# EAGLE board EasyBMS_Panel (EAGLE 9.6.2), part 1 of 2
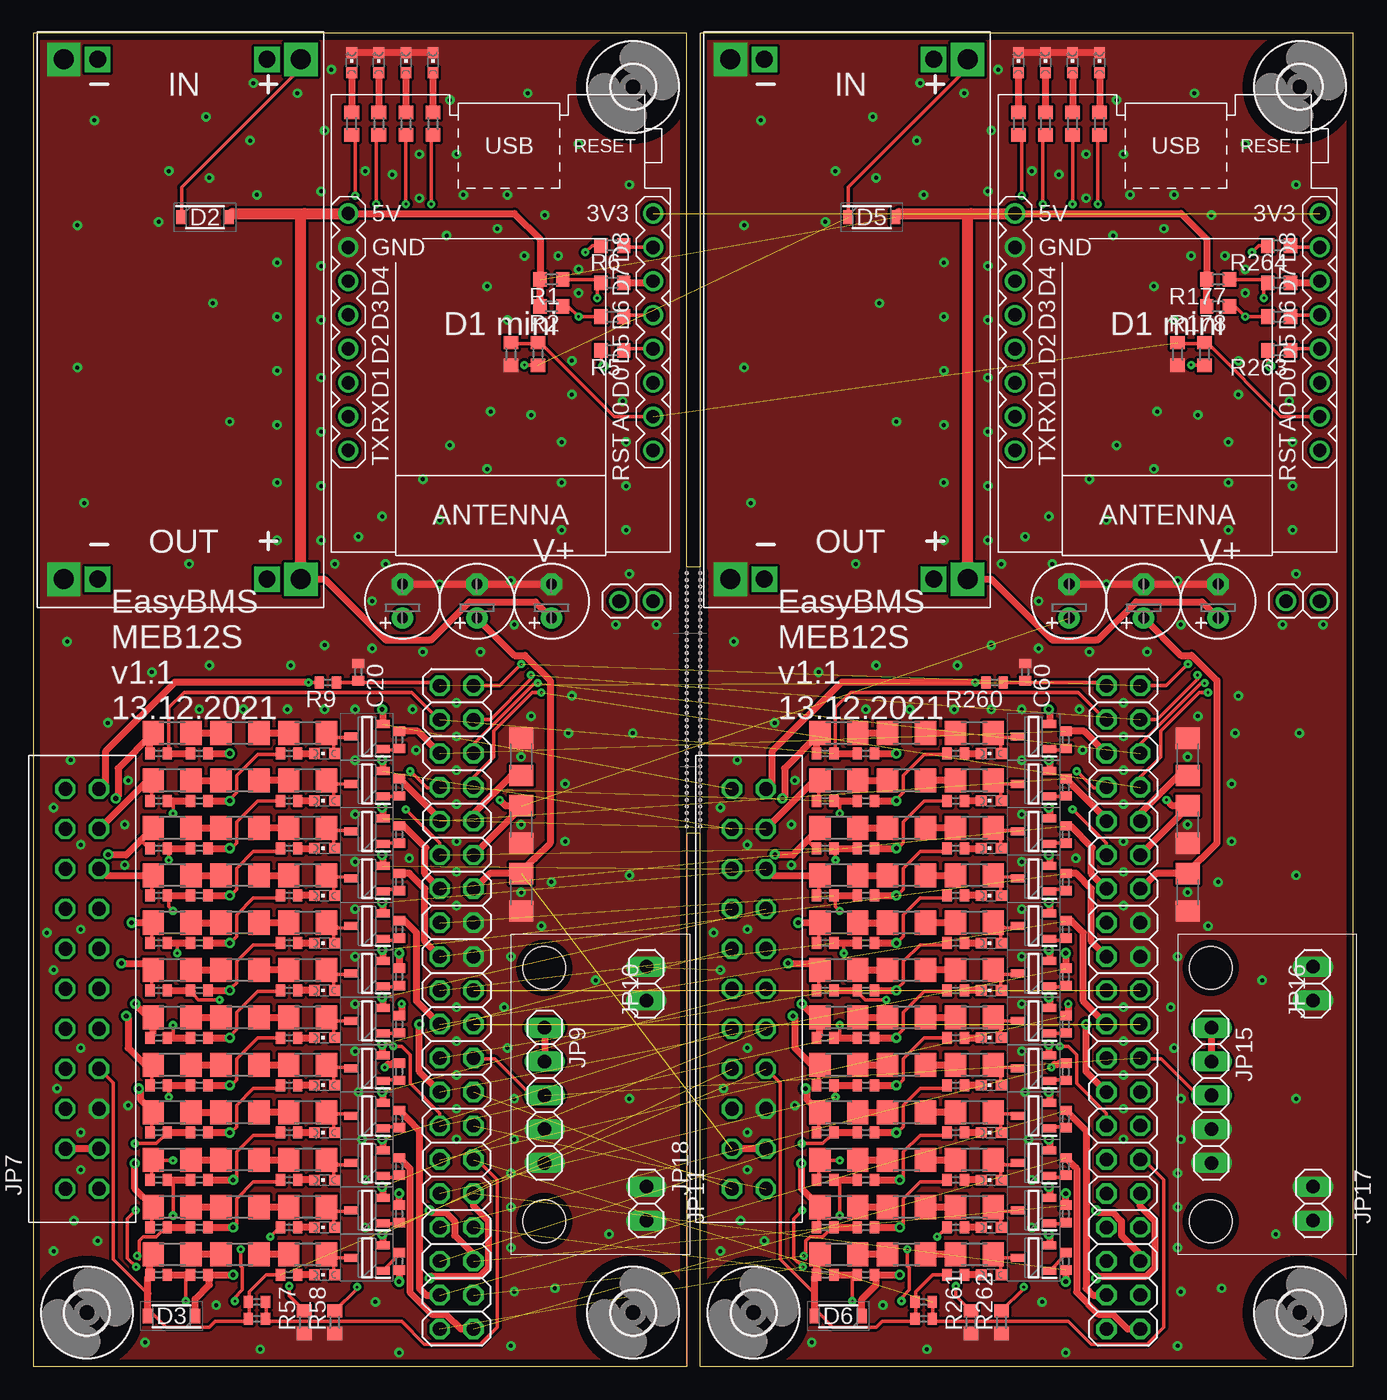
[diagram p0: board, top side]
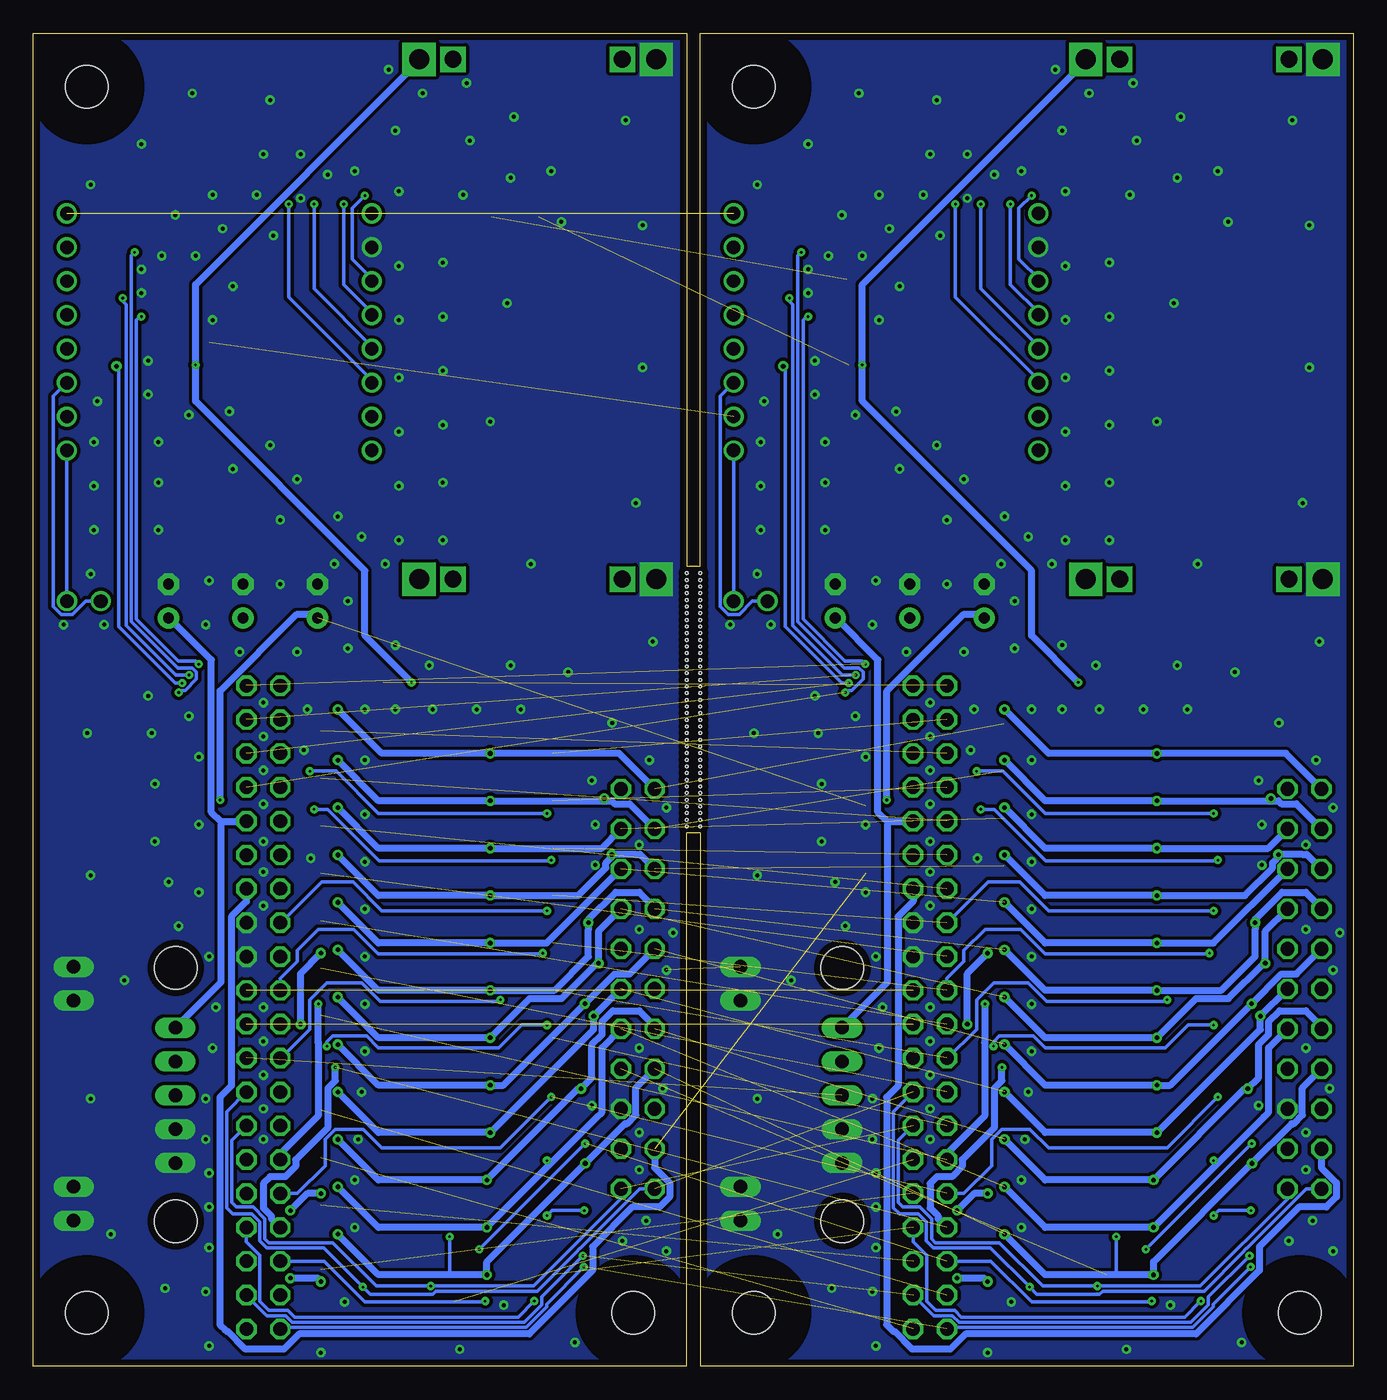
[diagram p1: board, bottom side, seen from below]

Size 99 x 100 mm. Coordinates in mm from the lower left corner, seen from the top.
Outline: 0,100 0,0 49,0 49,40 50,40 50,0 99,0 99,100 50,100 50,60 49,60 49,100 0,100
Copper layers (1*16): Top 0.035mm / dielectric 1.5mm / Bottom 0.035mm
Design rules "default *": minimum track width 11mil, minimum drill 0.2mm, track to track 4mil, track to pad 4mil, pad to pad 4mil, via to via 4mil, smd to smd 4mil, copper to edge 20mil, drill to drill 6mil, minimum pad ring 10mil, minimum via ring 8mil, stop-mask expansion 4mil, vias tented up to drill 0mil, thermal gap 10mil
Holes 3.2 mm at 38.31,29.88 38.31,10.88 88.31,29.88 88.31,10.88
Holes 0.2 mm at 49,54.5 50,54.5 50,54 50,53.5 50,53 50,52.5 50,52 50,51.5 50,51 50,50.5 50,50 50,49.5 50,49 50,48.5 50,47.5 50,48 50,47 50,46.5 50,45.5 50,46 49,45.5 49,46 49,46.5 49,47 49,47.5 49,48 49,48.5 49,49 49,49.5 49,50 49,50.5 49,51.5 49,51 49,52 49,52.5 49,53 49,53.5 49,54 49,55 50,55 50,55.5 50,56 50,56.5 50,57 49,57 49,56.5 49,56 49,55.5 49,45 49,44.5 49,44 49,43.5 49,43 50,43 50,43.5 50,44 50,44.5 50,45 49,57.5 50,57.5 50,58 50,58.5 50,59 50,59.5 49,59.5 49,59 49,58.5 49,58 49,42.5 49,42 49,41.5 49,41 49,40.5 50,40.5 50,41 50,41.5 50,42 50,42.5

## Footprints (pad centres in the part's own frame; a part is rotated, then mirrored left to right if it is on the bottom)
E2,5-6 = drill 0.813 pad 1.6: + -1.27,0 | drill 0.813 pad 1.6 octagon: - 1.27,0
C1206 = smd 1.6 x 1.8: 1 -1.4,0; 2 1.4,0
C0402 = smd 0.7 x 0.9: 1 -0.65,0; 2 0.65,0
SODFL3616X135N = smd 0.74 x 1.07: 1 -1.775,0; 2 1.775,0
3,2 = hole 3.2: 0,0
1X02 = drill 1.016: 1 -1.27,0; 2 1.27,0
2X20 = drill 1.016 octagon: 1 -24.13,-1.27; 2 -24.13,1.27; 3 -21.59,-1.27; 4 -21.59,1.27; 5 -19.05,-1.27; 6 -19.05,1.27; 7 -16.51,-1.27; 8 -16.51,1.27; 9 -13.97,-1.27; 10 -13.97,1.27; 11 -11.43,-1.27; 12 -11.43,1.27; 13 -8.89,-1.27; 14 -8.89,1.27; 15 -6.35,-1.27; 16 -6.35,1.27; 17 -3.81,-1.27; 18 -3.81,1.27; 19 -1.27,-1.27; 20 -1.27,1.27; 21 1.27,-1.27; 22 1.27,1.27; 23 3.81,-1.27; 24 3.81,1.27; 25 6.35,-1.27; 26 6.35,1.27; 27 8.89,-1.27; 28 8.89,1.27; 29 11.43,-1.27; 30 11.43,1.27; 31 13.97,-1.27; 32 13.97,1.27; 33 16.51,-1.27; 34 16.51,1.27; 35 19.05,-1.27; 36 19.05,1.27; 37 21.59,-1.27; 38 21.59,1.27; 39 24.13,-1.27; 40 24.13,1.27
2X11_MEB12S = drill 1.016 octagon: 1_TOTAL+ 15,-1.27; 2_TOTAL+2 15,1.27; 3_C10+ 12,-1.27; 4_C11+ 12,1.27; 5_C8+ 9,-1.27; 6_C9+ 9,1.27; 7_C6+ 6,-1.27; 8_C7+ 6,1.27; 9 3,-1.27; 10_C5+ 3,1.27; 11_C4+ 0,-1.27; 12 0,1.27; 13_C2+ -3,-1.27; 14_C3+ -3,1.27; 15_TOTAL- -6,-1.27; 16_C1+ -6,1.27; 17_TOTAL- -9,-1.27; 18 -9,1.27; 19_THERMO1_IN -12,-1.27; 20_THERMO2_IN -12,1.27; 21_THERMO1_OUT -15,-1.27; 22_THERMO2_OUT -15,1.27
1X05 = drill 1.016 long: 1 -5.08,0; 2 -2.54,0; 3 0,0; 4 2.54,0; 5 5.08,0
1X02' = drill 1.016 long: 1 -1.27,0; 2 1.27,0
CHIPLED_0603 = smd 0.8 x 0.8: A 0,-0.75; C 0,0.75
SOT96P237X111-3N = smd 1 x 0.6: 1 -1.2,0.955; 2 -1.2,-0.955; 3 1.2,0
R0603 = smd 1 x 1.1: 1 -0.85,0; 2 0.85,0
R0402 = smd 0.7 x 0.9: 1 -0.65,0; 2 0.65,0
R1206 = smd 1.6 x 1.803: 1 -1.422,0; 2 1.422,0
DC-DC-STEP-DOWN-LM2596HVS = drill 1.5 pad 2.5 square: IN+ 0,17.78; IN- 0,0; OUT+ 39,17.78; OUT- 39,0 | drill 1.27 pad 1.676 square: P$1 0,15.24; P$6 0,2.54; P$7 39,15.24; P$8 39,2.54
WEMOS-D1-MINI = drill 1: JP1.1 -11.43,9.525; JP1.2 -11.43,6.985; JP1.3 -11.43,4.445; JP1.4 -11.43,1.905; JP1.5 -11.43,-0.635; JP1.6 -11.43,-3.175; JP1.7 -11.43,-5.715; JP1.8 -11.43,-8.255; JP2.1 11.43,9.525; JP2.2 11.43,6.985; JP2.3 11.43,4.445; JP2.4 11.43,1.905; JP2.5 11.43,-0.635; JP2.6 11.43,-3.175; JP2.7 11.43,-5.715; JP2.8 11.43,-8.255

## Placement (x,y rotation side)
C1  1uF  [E2,5-6]  27.69,57.4 90 top
C2  1uF  [E2,5-6]  33.27,57.4 90 top
C3  1uF  [E2,5-6]  38.86,57.4 90 top
C4  100nF  [C1206]  36.58,35.56 270 top
C5  10nF  [C0402]  16.76,4.83 180 top
C6  10nF  [C0402]  9.4,6.86 180 top
C7  10nF  [C0402]  9.4,10.41 180 top
C8  10nF  [C0402]  9.4,17.53 180 top
C9  10nF  [C0402]  9.4,13.97 180 top
C10  10nF  [C0402]  9.4,21.08 180 top
C11  10nF  [C0402]  9.4,24.64 180 top
C12  10nF  [C0402]  9.4,28.19 180 top
C13  10nF  [C0402]  9.4,31.75 180 top
C14  10nF  [C0402]  9.4,35.31 180 top
C15  10nF  [C0402]  9.4,38.86 180 top
C16  10nF  [C0402]  9.4,42.42 180 top
C17  10nF  [C0402]  9.4,45.97 180 top
C18  100nF  [C1206]  36.58,40.64 270 top
C19  100nF  [C1206]  36.58,45.72 90 top
C20  100n  [C0402]  24.38,52.07 270 top
C41  1uF  [E2,5-6]  77.69,57.4 90 top
C42  1uF  [E2,5-6]  83.27,57.4 90 top
C43  1uF  [E2,5-6]  88.86,57.4 90 top
C44  10nF  [C0402]  66.76,4.83 180 top
C45  10nF  [C0402]  59.4,10.41 180 top
C46  10nF  [C0402]  59.4,6.86 180 top
C47  10nF  [C0402]  59.4,13.97 180 top
C48  10nF  [C0402]  59.4,17.53 180 top
C49  10nF  [C0402]  59.4,21.08 180 top
C50  10nF  [C0402]  59.4,24.64 180 top
C51  10nF  [C0402]  59.4,28.19 180 top
C52  10nF  [C0402]  59.4,31.75 180 top
C53  10nF  [C0402]  59.4,35.31 180 top
C54  10nF  [C0402]  59.4,38.86 180 top
C55  10nF  [C0402]  59.4,42.42 180 top
C56  10nF  [C0402]  59.4,45.97 180 top
C57  100nF  [C1206]  86.58,35.56 270 top
C58  100nF  [C1206]  86.58,40.64 270 top
C59  100nF  [C1206]  86.58,45.72 90 top
C60  100n  [C0402]  74.38,52.07 270 top
D2  SM4007PL-TP  [SODFL3616X135N]  12.88,86.2 0 top
D3  SM4007PL-TP  [SODFL3616X135N]  10.37,3.76 180 top
D5  SM4007PL-TP  [SODFL3616X135N]  62.88,86.2 0 top
D6  SM4007PL-TP  [SODFL3616X135N]  60.37,3.76 180 top
H1  MOUNT-HOLE3.2  [3,2]  4.02,4.02 0 top
H2  MOUNT-HOLE3.2  [3,2]  44.98,4.02 0 top
H3  MOUNT-HOLE3.2  [3,2]  44.98,95.98 0 top
H7  MOUNT-HOLE3.2  [3,2]  54.02,4.02 0 top
H8  MOUNT-HOLE3.2  [3,2]  94.98,4.02 0 top
H9  MOUNT-HOLE3.2  [3,2]  94.98,95.98 0 top
JP3  [1X02]  45.21,57.4 0 top
JP5  [2X20]  31.75,26.92 270 top
JP7  [2X11_MEB12S]  3.67,28.31 90 top
JP9  [1X05]  38.35,20.32 270 top
JP10  [1X02']  45.97,28.7 90 top
JP11  [1X02']  45.97,12.19 270 top
JP13  [1X02]  95.21,57.4 0 top
JP14  [2X20]  81.75,26.92 270 top
JP15  [1X05]  88.35,20.32 270 top
JP16  [1X02']  95.97,28.7 90 top
JP17  [1X02']  95.97,12.19 270 top
JP18  [2X11_MEB12S]  53.67,28.31 90 top
LED1  KT-0603R  [CHIPLED_0603]  29.97,97.79 0 top
LED2  KT-0603R  [CHIPLED_0603]  27.94,97.79 0 top
LED3  KT-0603R  [CHIPLED_0603]  25.91,97.79 0 top
LED4  KT-0603R  [CHIPLED_0603]  23.88,97.79 0 top
LED5  KT-0603R  [CHIPLED_0603]  21.84,6.86 90 top
LED6  KT-0603R  [CHIPLED_0603]  21.84,10.41 90 top
LED7  KT-0603R  [CHIPLED_0603]  21.84,17.53 90 top
LED8  KT-0603R  [CHIPLED_0603]  21.84,13.97 90 top
LED9  KT-0603R  [CHIPLED_0603]  21.84,21.08 90 top
LED11  KT-0603R  [CHIPLED_0603]  21.84,24.64 90 top
LED12  KT-0603R  [CHIPLED_0603]  21.84,28.19 90 top
LED13  KT-0603R  [CHIPLED_0603]  21.84,31.75 90 top
LED14  KT-0603R  [CHIPLED_0603]  21.84,35.31 90 top
LED15  KT-0603R  [CHIPLED_0603]  21.84,38.86 90 top
LED16  KT-0603R  [CHIPLED_0603]  21.84,42.42 90 top
LED17  KT-0603R  [CHIPLED_0603]  21.84,45.97 90 top
LED33  KT-0603R  [CHIPLED_0603]  73.88,97.79 0 top
LED34  KT-0603R  [CHIPLED_0603]  79.97,97.79 0 top
LED35  KT-0603R  [CHIPLED_0603]  77.94,97.79 0 top
LED36  KT-0603R  [CHIPLED_0603]  75.91,97.79 0 top
LED37  KT-0603R  [CHIPLED_0603]  71.84,10.41 90 top
LED38  KT-0603R  [CHIPLED_0603]  71.84,6.86 90 top
LED39  KT-0603R  [CHIPLED_0603]  71.84,13.97 90 top
LED40  KT-0603R  [CHIPLED_0603]  71.84,17.53 90 top
LED41  KT-0603R  [CHIPLED_0603]  71.84,21.08 90 top
LED42  KT-0603R  [CHIPLED_0603]  71.84,24.64 90 top
LED43  KT-0603R  [CHIPLED_0603]  71.84,28.19 90 top
LED44  KT-0603R  [CHIPLED_0603]  71.84,31.75 90 top
LED45  KT-0603R  [CHIPLED_0603]  71.84,35.31 90 top
LED46  KT-0603R  [CHIPLED_0603]  71.84,38.86 90 top
LED47  KT-0603R  [CHIPLED_0603]  71.84,42.42 90 top
LED48  KT-0603R  [CHIPLED_0603]  71.84,45.97 90 top
Q2  BSS84LT1G  [SOT96P237X111-3N]  25.02,8.13 180 top
Q3  BSS84LT1G  [SOT96P237X111-3N]  25.02,11.68 180 top
Q4  BSS84LT1G  [SOT96P237X111-3N]  25.02,18.8 180 top
Q5  BSS84LT1G  [SOT96P237X111-3N]  25.02,15.24 180 top
Q6  BSS84LT1G  [SOT96P237X111-3N]  25.02,22.35 180 top
Q7  BSS84LT1G  [SOT96P237X111-3N]  25.02,25.91 180 top
Q8  BSS84LT1G  [SOT96P237X111-3N]  25.02,29.46 180 top
Q9  BSS84LT1G  [SOT96P237X111-3N]  25.02,33.02 180 top
Q10  BSS84LT1G  [SOT96P237X111-3N]  25.02,36.58 180 top
Q11  BSS84LT1G  [SOT96P237X111-3N]  25.02,40.13 180 top
Q12  BSS84LT1G  [SOT96P237X111-3N]  25.02,43.69 180 top
Q13  BSS84LT1G  [SOT96P237X111-3N]  25.02,47.24 180 top
Q25  BSS84LT1G  [SOT96P237X111-3N]  75.02,11.68 180 top
Q26  BSS84LT1G  [SOT96P237X111-3N]  75.02,8.13 180 top
Q27  BSS84LT1G  [SOT96P237X111-3N]  75.02,15.24 180 top
Q28  BSS84LT1G  [SOT96P237X111-3N]  75.02,18.8 180 top
Q29  BSS84LT1G  [SOT96P237X111-3N]  75.02,22.35 180 top
Q30  BSS84LT1G  [SOT96P237X111-3N]  75.02,25.91 180 top
Q31  BSS84LT1G  [SOT96P237X111-3N]  75.02,29.46 180 top
Q32  BSS84LT1G  [SOT96P237X111-3N]  75.02,33.02 180 top
Q33  BSS84LT1G  [SOT96P237X111-3N]  75.02,36.58 180 top
Q34  BSS84LT1G  [SOT96P237X111-3N]  75.02,40.13 180 top
Q35  BSS84LT1G  [SOT96P237X111-3N]  75.02,43.69 180 top
Q36  BSS84LT1G  [SOT96P237X111-3N]  75.02,47.24 180 top
R1  5K1  [R0603]  38.86,81.53 180 top
R2  5K1  [R0603]  38.86,79.5 180 top
R3  100R  [R0402]  16.76,3.56 180 top
R4  10R0  [R1206]  10.41,8.38 0 top
R5  1k  [R0603]  43.43,76.2 180 top
R6  1k  [R0603]  43.43,84.07 180 top
R7  10R0  [R1206]  15.49,8.38 0 top
R8  10R0  [R1206]  20.57,8.38 0 top
R9  100R  [R0402]  22.1,51.31 180 top
R10  3.3k  [R0402]  27.43,7.87 90 top
R11  470R  [R0402]  19.18,6.86 180 top
R12  100R  [R0402]  12.45,6.86 0 top
R14  10R0  [R1206]  10.41,11.94 0 top
R15  470k  [R0603]  37.85,75.95 270 top
R16  27K  [R0603]  35.81,75.95 90 top
R20  10R0  [R1206]  15.49,11.94 0 top
R21  10R0  [R1206]  20.57,11.94 0 top
R22  3.3k  [R0402]  27.43,11.43 270 top
R23  470R  [R0402]  19.18,10.41 180 top
R24  100R  [R0402]  12.45,10.41 0 top
R25  10R0  [R1206]  10.41,19.05 0 top
R26  10R0  [R1206]  15.49,19.05 0 top
R27  10R0  [R1206]  20.57,19.05 0 top
R28  3.3k  [R0402]  27.43,18.54 270 top
R29  470R  [R0402]  19.18,17.53 180 top
R30  100R  [R0402]  12.45,17.53 0 top
R31  10R0  [R1206]  10.41,15.49 0 top
R32  10R0  [R1206]  15.49,15.49 0 top
R33  10R0  [R1206]  20.57,15.49 0 top
R34  3.3k  [R0402]  27.43,14.99 270 top
R35  470R  [R0402]  19.18,13.97 180 top
R36  100R  [R0402]  12.45,13.97 0 top
R37  10R0  [R1206]  10.41,22.61 0 top
R38  10R0  [R1206]  15.49,22.61 0 top
R39  10R0  [R1206]  20.57,22.61 0 top
R40  3.3k  [R0402]  27.43,22.1 270 top
R41  470R  [R0402]  19.18,21.08 180 top
R42  100R  [R0402]  12.45,21.08 0 top
R43  10R0  [R1206]  10.41,26.16 0 top
R44  10R0  [R1206]  15.49,26.16 0 top
R45  10R0  [R1206]  20.57,26.16 0 top
R46  3.3k  [R0402]  27.43,25.65 270 top
R47  470R  [R0402]  19.18,24.64 180 top
R48  100R  [R0402]  12.45,24.64 0 top
R49  10R0  [R1206]  10.41,29.72 0 top
R50  10R0  [R1206]  15.49,29.72 0 top
R51  10R0  [R1206]  20.57,29.72 0 top
R52  3.3k  [R0402]  27.43,29.21 270 top
R53  200R0  [R0603]  29.97,93.22 270 top
R54  200R0  [R0603]  27.94,93.22 270 top
R55  200R0  [R0603]  25.91,93.22 270 top
R56  200R0  [R0603]  23.88,93.22 270 top
R57  12k  [R0603]  20.32,3.3 90 top
R58  12k  [R0603]  22.61,3.3 90 top
R61  1k  [R0603]  43.43,78.74 180 top
R62  1k  [R0603]  43.43,81.28 180 top
R63  470R  [R0402]  19.18,28.19 180 top
R64  100R  [R0402]  12.45,28.19 0 top
R65  10R0  [R1206]  10.41,33.27 0 top
R66  10R0  [R1206]  15.49,33.27 0 top
R67  10R0  [R1206]  20.57,33.27 0 top
R68  3.3k  [R0402]  27.43,32.77 270 top
R69  470R  [R0402]  19.18,31.75 180 top
R70  100R  [R0402]  12.45,31.75 0 top
R71  10R0  [R1206]  10.41,36.83 0 top
R72  10R0  [R1206]  15.49,36.83 0 top
R73  10R0  [R1206]  20.57,36.83 0 top
R74  3.3k  [R0402]  27.43,36.32 270 top
R75  470R  [R0402]  19.18,35.31 180 top
R76  100R  [R0402]  12.45,35.31 0 top
R77  10R0  [R1206]  10.41,40.39 0 top
R78  10R0  [R1206]  15.49,40.39 0 top
R79  10R0  [R1206]  20.57,40.39 0 top
R80  3.3k  [R0402]  27.43,39.88 270 top
R81  470R  [R0402]  19.18,38.86 180 top
R83  100R  [R0402]  12.45,38.86 0 top
R84  10R0  [R1206]  10.41,43.94 0 top
R85  10R0  [R1206]  15.49,43.94 0 top
R86  10R0  [R1206]  20.57,43.94 0 top
R87  3.3k  [R0402]  27.43,43.43 270 top
R88  470R  [R0402]  19.18,42.42 180 top
R89  100R  [R0402]  12.45,42.42 0 top
R90  10R0  [R1206]  10.41,47.5 0 top
R91  10R0  [R1206]  15.49,47.5 0 top
R92  10R0  [R1206]  20.57,47.5 0 top
R93  3.3k  [R0402]  27.43,46.99 270 top
R94  470R  [R0402]  19.18,45.97 180 top
R95  100R  [R0402]  12.45,45.97 0 top
R177  5K1  [R0603]  88.86,81.53 180 top
R178  5K1  [R0603]  88.86,79.5 180 top
R179  470k  [R0603]  87.85,75.95 270 top
R180  27K  [R0603]  85.81,75.95 90 top
R181  200R0  [R0603]  79.97,93.22 270 top
R182  200R0  [R0603]  77.94,93.22 270 top
R183  200R0  [R0603]  75.91,93.22 270 top
R184  200R0  [R0603]  73.88,93.22 270 top
R185  1k  [R0603]  93.43,78.74 180 top
R186  1k  [R0603]  93.43,81.28 180 top
R187  100R  [R0402]  66.76,3.56 180 top
R188  10R0  [R1206]  60.41,11.94 0 top
R189  10R0  [R1206]  65.49,11.94 0 top
R190  10R0  [R1206]  70.57,11.94 0 top
R191  3.3k  [R0402]  77.43,11.43 270 top
R192  470R  [R0402]  69.18,10.41 180 top
R193  100R  [R0402]  62.45,10.41 0 top
R194  10R0  [R1206]  60.41,8.38 0 top
R195  10R0  [R1206]  65.49,8.38 0 top
R196  10R0  [R1206]  70.57,8.38 0 top
R197  3.3k  [R0402]  77.43,7.87 90 top
R198  470R  [R0402]  69.18,6.86 180 top
R199  100R  [R0402]  62.45,6.86 0 top
R200  10R0  [R1206]  60.41,15.49 0 top
R201  10R0  [R1206]  65.49,15.49 0 top
R202  10R0  [R1206]  70.57,15.49 0 top
R203  3.3k  [R0402]  77.43,14.99 270 top
R204  470R  [R0402]  69.18,13.97 180 top
R205  100R  [R0402]  62.45,13.97 0 top
R206  10R0  [R1206]  60.41,19.05 0 top
R207  10R0  [R1206]  65.49,19.05 0 top
R208  10R0  [R1206]  70.57,19.05 0 top
R209  3.3k  [R0402]  77.43,18.54 270 top
R210  470R  [R0402]  69.18,17.53 180 top
R211  100R  [R0402]  62.45,17.53 0 top
R212  10R0  [R1206]  60.41,22.61 0 top
R213  10R0  [R1206]  65.49,22.61 0 top
R214  10R0  [R1206]  70.57,22.61 0 top
R215  3.3k  [R0402]  77.43,22.1 270 top
R216  470R  [R0402]  69.18,21.08 180 top
R217  100R  [R0402]  62.45,21.08 0 top
R218  10R0  [R1206]  60.41,26.16 0 top
R219  10R0  [R1206]  65.49,26.16 0 top
R220  10R0  [R1206]  70.57,26.16 0 top
R221  3.3k  [R0402]  77.43,25.65 270 top
R222  470R  [R0402]  69.18,24.64 180 top
R223  100R  [R0402]  62.45,24.64 0 top
R224  10R0  [R1206]  60.41,29.72 0 top
R225  10R0  [R1206]  65.49,29.72 0 top
R226  10R0  [R1206]  70.57,29.72 0 top
R227  3.3k  [R0402]  77.43,29.21 270 top
R228  470R  [R0402]  69.18,28.19 180 top
R229  100R  [R0402]  62.45,28.19 0 top
R230  10R0  [R1206]  60.41,33.27 0 top
R231  10R0  [R1206]  65.49,33.27 0 top
R232  10R0  [R1206]  70.57,33.27 0 top
R233  3.3k  [R0402]  77.43,32.77 270 top
R234  470R  [R0402]  69.18,31.75 180 top
R235  100R  [R0402]  62.45,31.75 0 top
R236  10R0  [R1206]  60.41,36.83 0 top
R237  10R0  [R1206]  65.49,36.83 0 top
R238  10R0  [R1206]  70.57,36.83 0 top
R239  3.3k  [R0402]  77.43,36.32 270 top
R240  470R  [R0402]  69.18,35.31 180 top
R241  100R  [R0402]  62.45,35.31 0 top
R242  10R0  [R1206]  60.41,40.39 0 top
R243  10R0  [R1206]  65.49,40.39 0 top
R244  10R0  [R1206]  70.57,40.39 0 top
R245  3.3k  [R0402]  77.43,39.88 270 top
R246  470R  [R0402]  69.18,38.86 180 top
R247  100R  [R0402]  62.45,38.86 0 top
R248  10R0  [R1206]  60.41,43.94 0 top
R249  10R0  [R1206]  65.49,43.94 0 top
R250  10R0  [R1206]  70.57,43.94 0 top
R251  3.3k  [R0402]  77.43,43.43 270 top
R252  470R  [R0402]  69.18,42.42 180 top
R253  100R  [R0402]  62.45,42.42 0 top
R254  10R0  [R1206]  60.41,47.5 0 top
R255  10R0  [R1206]  65.49,47.5 0 top
R256  10R0  [R1206]  70.57,47.5 0 top
R257  3.3k  [R0402]  77.43,46.99 270 top
R258  470R  [R0402]  69.18,45.97 180 top
R259  100R  [R0402]  62.45,45.97 0 top
R260  100R  [R0402]  72.1,51.31 180 top
R261  12k  [R0603]  70.32,3.3 90 top
R262  12k  [R0603]  72.61,3.3 90 top
R263  1k  [R0603]  93.43,76.2 180 top
R264  1k  [R0603]  93.43,84.07 180 top
U$1  DC-DC-STEP-DOWN-LM2596HVS  [DC-DC-STEP-DOWN-LM2596HVS]  2.29,98.04 270 top
U$2  WEMOS-D1-MINI  [WEMOS-D1-MINI]  35.05,78.23 180 top
U$5  DC-DC-STEP-DOWN-LM2596HVS  [DC-DC-STEP-DOWN-LM2596HVS]  52.29,98.04 270 top
U$6  WEMOS-D1-MINI  [WEMOS-D1-MINI]  85.05,78.23 180 top

## Library data of the parts
C1-C20 C41-C60 R1-R12 R14-R16 R20-R58 R61-R81 R83-R95 R177-R264 = rcl
D2 D3 D5 D6 = SamacSys_Parts; DESCRIPTION: Rectifiers 1A, 1000V 1A, 1000V; HEIGHT: 1.35mm; MANUFACTURER_NAME: Micro Commercial Components (MCC); MANUFACTURER_PART_NUMBER: SM4007PL-TP; MOUSER_PART_NUMBER: 833-SM4007PL-TP; MOUSER_PRICE-STOCK: https://www.mouser.co.uk/ProductDetail/Micro-Commercial-Components-MCC/SM4007PL-TP?qs=SdqRYZZ9IxCh9ylwm1K3UA%3D%3D
H1-H3 H7-H9 = holes
JP3 JP7 JP13 JP18 = pinhead_own
JP5 JP9-JP11 JP14-JP17 = pinhead
LED1-LED9 LED11-LED17 LED33-LED48 = led
Q2-Q13 Q25-Q36 = SamacSys_Parts; DESCRIPTION: MOSFET 50V 130mA P-Channel; HEIGHT: 1.11mm; MANUFACTURER_NAME: ON Semiconductor; MANUFACTURER_PART_NUMBER: BSS84LT1G; MOUSER_PART_NUMBER: 863-BSS84LT1G; MOUSER_PRICE-STOCK: https://www.mouser.co.uk/ProductDetail/ON-Semiconductor/BSS84LT1G?qs=vNc2DXHODiKIGu9QIvMAfw%3D%3D
U$1 U$2 U$5 U$6 = diy-modules

## Nets
3V3: U$2.JP1.8 U$6.JP1.8
5VDC: C3.+ C19.1 C43.+ C59.1 D2.2 D5.2 JP5.10 JP9.1 JP9.2 JP14.10 JP15.1 JP15.2 R1.2 R2.2 R177.2 R178.2 U$1.OUT+ U$2.JP2.8 U$5.OUT+ U$6.JP2.8
A0IN: R15.1 R16.2 R179.1 R180.2 U$2.JP1.2 U$6.JP1.2
C0: C5.1 C44.1 JP5.30 JP14.30 R3.1 R187.1
C1: C6.1 C46.1 JP5.34 JP14.34 R12.1 R199.1
C1+: C7.2 C45.2 D3.1 D6.1 JP7.16_C1+ JP18.16_C1+ Q2.2 Q26.2 R12.2 R14.1 R23.2 R188.1 R192.2 R199.2
C1-: C5.2 C6.2 C44.2 C46.2 D3.2 D6.2 JP7.15_TOTAL- JP18.15_TOTAL- R3.2 R4.1 R11.2 R187.2 R194.1 R198.2
C2: C7.1 C45.1 JP5.38 JP14.38 R24.1 R193.1
C2+: C9.2 C47.2 JP7.13_C2+ JP18.13_C2+ Q3.2 Q25.2 R24.2 R31.1 R35.2 R193.2 R200.1 R204.2
C3: C9.1 C47.1 JP5.39 JP14.39 R36.1 R205.1
C3+: C8.2 C48.2 JP7.14_C3+ JP18.14_C3+ Q5.2 Q27.2 R25.1 R29.2 R36.2 R205.2 R206.1 R210.2
C4: C8.1 C48.1 JP5.35 JP14.35 R30.1 R211.1
C4+: C10.2 C49.2 JP7.11_C4+ JP18.11_C4+ Q4.2 Q28.2 R30.2 R37.1 R41.2 R211.2 R212.1 R216.2
C5: C10.1 C49.1 JP5.31 JP14.31 R42.1 R217.1
C5+: C11.2 C50.2 JP7.10_C5+ JP18.10_C5+ Q6.2 Q29.2 R42.2 R43.1 R47.2 R217.2 R218.1 R222.2
C6: C11.1 C50.1 JP5.27 JP14.27 R48.1 R223.1
C6+: C12.2 C51.2 JP7.7_C6+ JP18.7_C6+ Q7.2 Q30.2 R48.2 R49.1 R63.2 R223.2 R224.1 R228.2
C7: C12.1 C51.1 JP5.23 JP14.23 R64.1 R229.1
C7+: C13.2 C52.2 JP7.8_C7+ JP18.8_C7+ Q8.2 Q31.2 R64.2 R65.1 R69.2 R229.2 R230.1 R234.2
C8: C13.1 C52.1 JP5.19 JP14.19 R70.1 R235.1
C8+: C14.2 C53.2 JP7.5_C8+ JP18.5_C8+ Q9.2 Q32.2 R70.2 R71.1 R75.2 R235.2 R236.1 R240.2
C9: C14.1 C53.1 JP5.15 JP14.15 R76.1 R241.1
C9+: C15.2 C54.2 JP7.6_C9+ JP18.6_C9+ Q10.2 Q33.2 R76.2 R77.1 R81.2 R241.2 R242.1 R246.2
C10: C15.1 C54.1 JP5.11 JP14.11 R83.1 R247.1
C10+: C16.2 C55.2 JP7.3_C10+ JP18.3_C10+ Q11.2 Q34.2 R83.2 R84.1 R88.2 R247.2 R248.1 R252.2
C11: C16.1 C55.1 JP5.7 JP14.7 R89.1 R253.1
C11+: C17.2 C56.2 JP7.4_C11+ JP18.4_C11+ Q12.2 Q35.2 R89.2 R90.1 R94.2 R253.2 R254.1 R258.2
C12: C17.1 C56.1 JP5.3 JP14.3 R95.1 R259.1
C12+: JP7.2_TOTAL+2 JP18.2_TOTAL+2 Q13.2 Q36.2 R95.2 R259.2
CSB: JP5.8 JP14.8 R6.2 R264.2
GND: C1.- C2.- C3.- C4.2 C18.2 C19.2 C20.1 C41.- C42.- C43.- C57.2 C58.2 C59.2 C60.1 JP5.16 JP5.18 JP7.17_TOTAL- JP9.4 JP9.5 JP10.1 JP10.2 JP11.1 JP11.2 JP14.16 JP14.18 JP15.4 JP15.5 JP16.1 JP16.2 JP17.1 JP17.2 JP18.17_TOTAL- LED1.C LED2.C LED3.C LED4.C LED33.C LED34.C LED35.C LED36.C R16.1 R57.1 R58.1 R180.1 R261.1 R262.1 U$1.IN- U$1.OUT- U$2.JP2.7 U$5.IN- U$5.OUT- U$6.JP2.7
GPIO4: JP5.22 JP14.22
GPIO5: JP5.20 JP14.20
ISIGNAL: JP5.24 JP9.3 JP14.24 JP15.3
MISO: JP5.2 JP14.2 R2.1 R61.2 R178.1 R185.2
MOSI: JP5.4 JP14.4 R1.1 R62.2 R177.1 R186.2
N$1: LED1.A R53.1
N$2: LED2.A R54.1
N$3: LED3.A R55.1
N$4: LED4.A R56.1
N$5: JP3.2 U$2.JP1.1
N$6: JP3.1 U$2.JP1.3
N$7: R5.1 U$2.JP1.4
N$8: R4.2 R7.1
N$9: R7.2 R8.1
N$10: LED5.A Q2.3 R8.2
N$11: Q2.1 R10.2
N$12: LED5.C R11.1
N$13: R14.2 R20.1
N$14: R20.2 R21.1
N$15: R6.1 U$2.JP1.7
N$16: LED6.A Q3.3 R21.2
N$19: Q3.1 R22.2
N$20: LED6.C R23.1
N$21: R25.2 R26.1
N$22: R26.2 R27.1
N$23: LED7.A Q4.3 R27.2
N$24: Q4.1 R28.2
N$26: LED7.C R29.1
N$27: R31.2 R32.1
N$28: R32.2 R33.1
N$29: LED8.A Q5.3 R33.2
N$30: R56.2 U$2.JP2.6
N$31: Q5.1 R34.2
N$32: LED8.C R35.1
N$33: R37.2 R38.1
N$34: R38.2 R39.1
N$35: LED9.A Q6.3 R39.2
N$36: Q6.1 R40.2
N$37: LED9.C R41.1
N$38: R43.2 R44.1
N$39: R44.2 R45.1
N$40: LED11.A Q7.3 R45.2
N$41: Q7.1 R46.2
N$42: LED11.C R47.1
N$43: R49.2 R50.1
N$44: R50.2 R51.1
N$45: LED12.A Q8.3 R51.2
N$46: Q8.1 R52.2
N$47: LED12.C R63.1
N$48: R65.2 R66.1
N$49: R66.2 R67.1
N$50: LED13.A Q9.3 R67.2
N$51: Q9.1 R68.2
N$52: LED13.C R69.1
N$53: R71.2 R72.1
N$54: R72.2 R73.1
N$55: LED14.A Q10.3 R73.2
N$56: Q10.1 R74.2
N$57: LED14.C R75.1
N$58: R77.2 R78.1
N$59: R78.2 R79.1
N$60: LED15.A Q11.3 R79.2
N$61: Q11.1 R80.2
N$62: LED15.C R81.1
N$63: R84.2 R85.1
N$64: R85.2 R86.1
N$65: LED16.A Q12.3 R86.2
N$66: Q12.1 R87.2
N$67: LED16.C R88.1
N$68: R90.2 R91.1
N$69: R91.2 R92.1
N$70: R53.2 U$2.JP2.3
N$71: LED17.A Q13.3 R92.2
N$72: Q13.1 R93.2
N$73: R61.1 U$2.JP1.5
N$74: LED17.C R94.1
N$119: R62.1 U$2.JP1.6
N$120: R55.2 U$2.JP2.5
N$124: R54.2 U$2.JP2.4
N$149: LED34.A R181.1
N$150: LED35.A R182.1
N$151: LED36.A R183.1
N$152: LED33.A R184.1
N$153: R181.2 U$6.JP2.3
N$154: R184.2 U$6.JP2.6
N$155: R183.2 U$6.JP2.5
N$156: R182.2 U$6.JP2.4
N$157: R185.1 U$6.JP1.5
N$158: R186.1 U$6.JP1.6
N$159: JP13.2 U$6.JP1.1
N$160: JP13.1 U$6.JP1.3
N$161: R188.2 R189.1
N$162: R189.2 R190.1
N$163: LED37.A Q25.3 R190.2
N$164: Q25.1 R191.2
N$165: LED37.C R192.1
N$166: R194.2 R195.1
N$167: R195.2 R196.1
N$168: LED38.A Q26.3 R196.2
N$169: Q26.1 R197.2
N$170: LED38.C R198.1
N$171: R200.2 R201.1
N$172: R201.2 R202.1
N$173: LED39.A Q27.3 R202.2
N$174: Q27.1 R203.2
N$175: LED39.C R204.1
N$176: R206.2 R207.1
N$177: R207.2 R208.1
N$178: LED40.A Q28.3 R208.2
N$179: Q28.1 R209.2
N$180: LED40.C R210.1
N$181: R212.2 R213.1
N$182: R213.2 R214.1
N$183: LED41.A Q29.3 R214.2
N$184: Q29.1 R215.2
N$185: LED41.C R216.1
N$186: R218.2 R219.1
N$187: R219.2 R220.1
N$188: LED42.A Q30.3 R220.2
N$189: Q30.1 R221.2
N$190: LED42.C R222.1
N$191: R224.2 R225.1
N$192: R225.2 R226.1
N$193: LED43.A Q31.3 R226.2
N$194: Q31.1 R227.2
N$195: LED43.C R228.1
N$196: R230.2 R231.1
N$197: R231.2 R232.1
N$198: LED44.A Q32.3 R232.2
N$199: Q32.1 R233.2
N$200: LED44.C R234.1
N$201: R236.2 R237.1
N$205: R237.2 R238.1
N$239: LED45.A Q33.3 R238.2
N$240: Q33.1 R239.2
N$241: LED45.C R240.1
N$242: R242.2 R243.1
N$243: R243.2 R244.1
N$244: LED46.A Q34.3 R244.2
N$245: Q34.1 R245.2
N$246: LED46.C R246.1
N$247: R248.2 R249.1
N$248: R249.2 R250.1
N$249: LED47.A Q35.3 R250.2
N$250: Q35.1 R251.2
N$251: LED47.C R252.1
N$252: R254.2 R255.1
N$253: R255.2 R256.1
N$254: LED48.A Q36.3 R256.2
N$255: Q36.1 R257.2
N$256: LED48.C R258.1
N$257: R263.1 U$6.JP1.4
N$258: R264.1 U$6.JP1.7
S1: JP5.32 JP14.32 R10.1 R197.1
S2: JP5.36 JP14.36 R22.1 R191.1
S3: JP5.40 JP14.40 R34.1 R203.1
S4: JP5.37 JP14.37 R28.1 R209.1
S5: JP5.33 JP14.33 R40.1 R215.1
S6: JP5.29 JP14.29 R46.1 R221.1
S7: JP5.25 JP14.25 R52.1 R227.1
S8: JP5.21 JP14.21 R68.1 R233.1
S9: JP5.17 JP14.17 R74.1 R239.1
S10: JP5.13 JP14.13 R80.1 R245.1
S11: JP5.9 JP14.9 R87.1 R251.1
S12: JP5.5 JP14.5 R93.1 R257.1
SCK: JP5.6 JP14.6 R5.2 R263.2
V+: C20.2 C60.2 JP5.1 JP14.1 R9.1 R260.1
VIN: D2.1 D5.1 JP7.1_TOTAL+ JP18.1_TOTAL+ R9.2 R15.2 R179.2 R260.2 U$1.IN+ U$5.IN+
VREF1: C1.+ C18.1 C41.+ C58.1 JP5.12 JP14.12
VREF2: C2.+ C4.1 C42.+ C57.1 JP5.14 JP7.19_THERMO1_IN JP7.20_THERMO2_IN JP14.14 JP18.19_THERMO1_IN JP18.20_THERMO2_IN
VTEMP1: JP5.28 JP7.21_THERMO1_OUT JP14.28 JP18.21_THERMO1_OUT R57.2 R261.2
VTEMP2: JP5.26 JP7.22_THERMO2_OUT JP14.26 JP18.22_THERMO2_OUT R58.2 R262.2